# Altium PCB ECG_NEMO_final.PcbDoc
Units mm, origin at the board's own origin, x right, y up, seen from the top; angles counter-clockwise.
Board outline 225.82 x 153.5 mm, 4 copper layers (Top Layer, Signal Layer 1, Signal Layer 2, Bottom Layer), stack 0.778 mm thick; 195 components, 103 nets, 618 pads, 3 vias.
Unrouted connection lines stored in the file: 392.
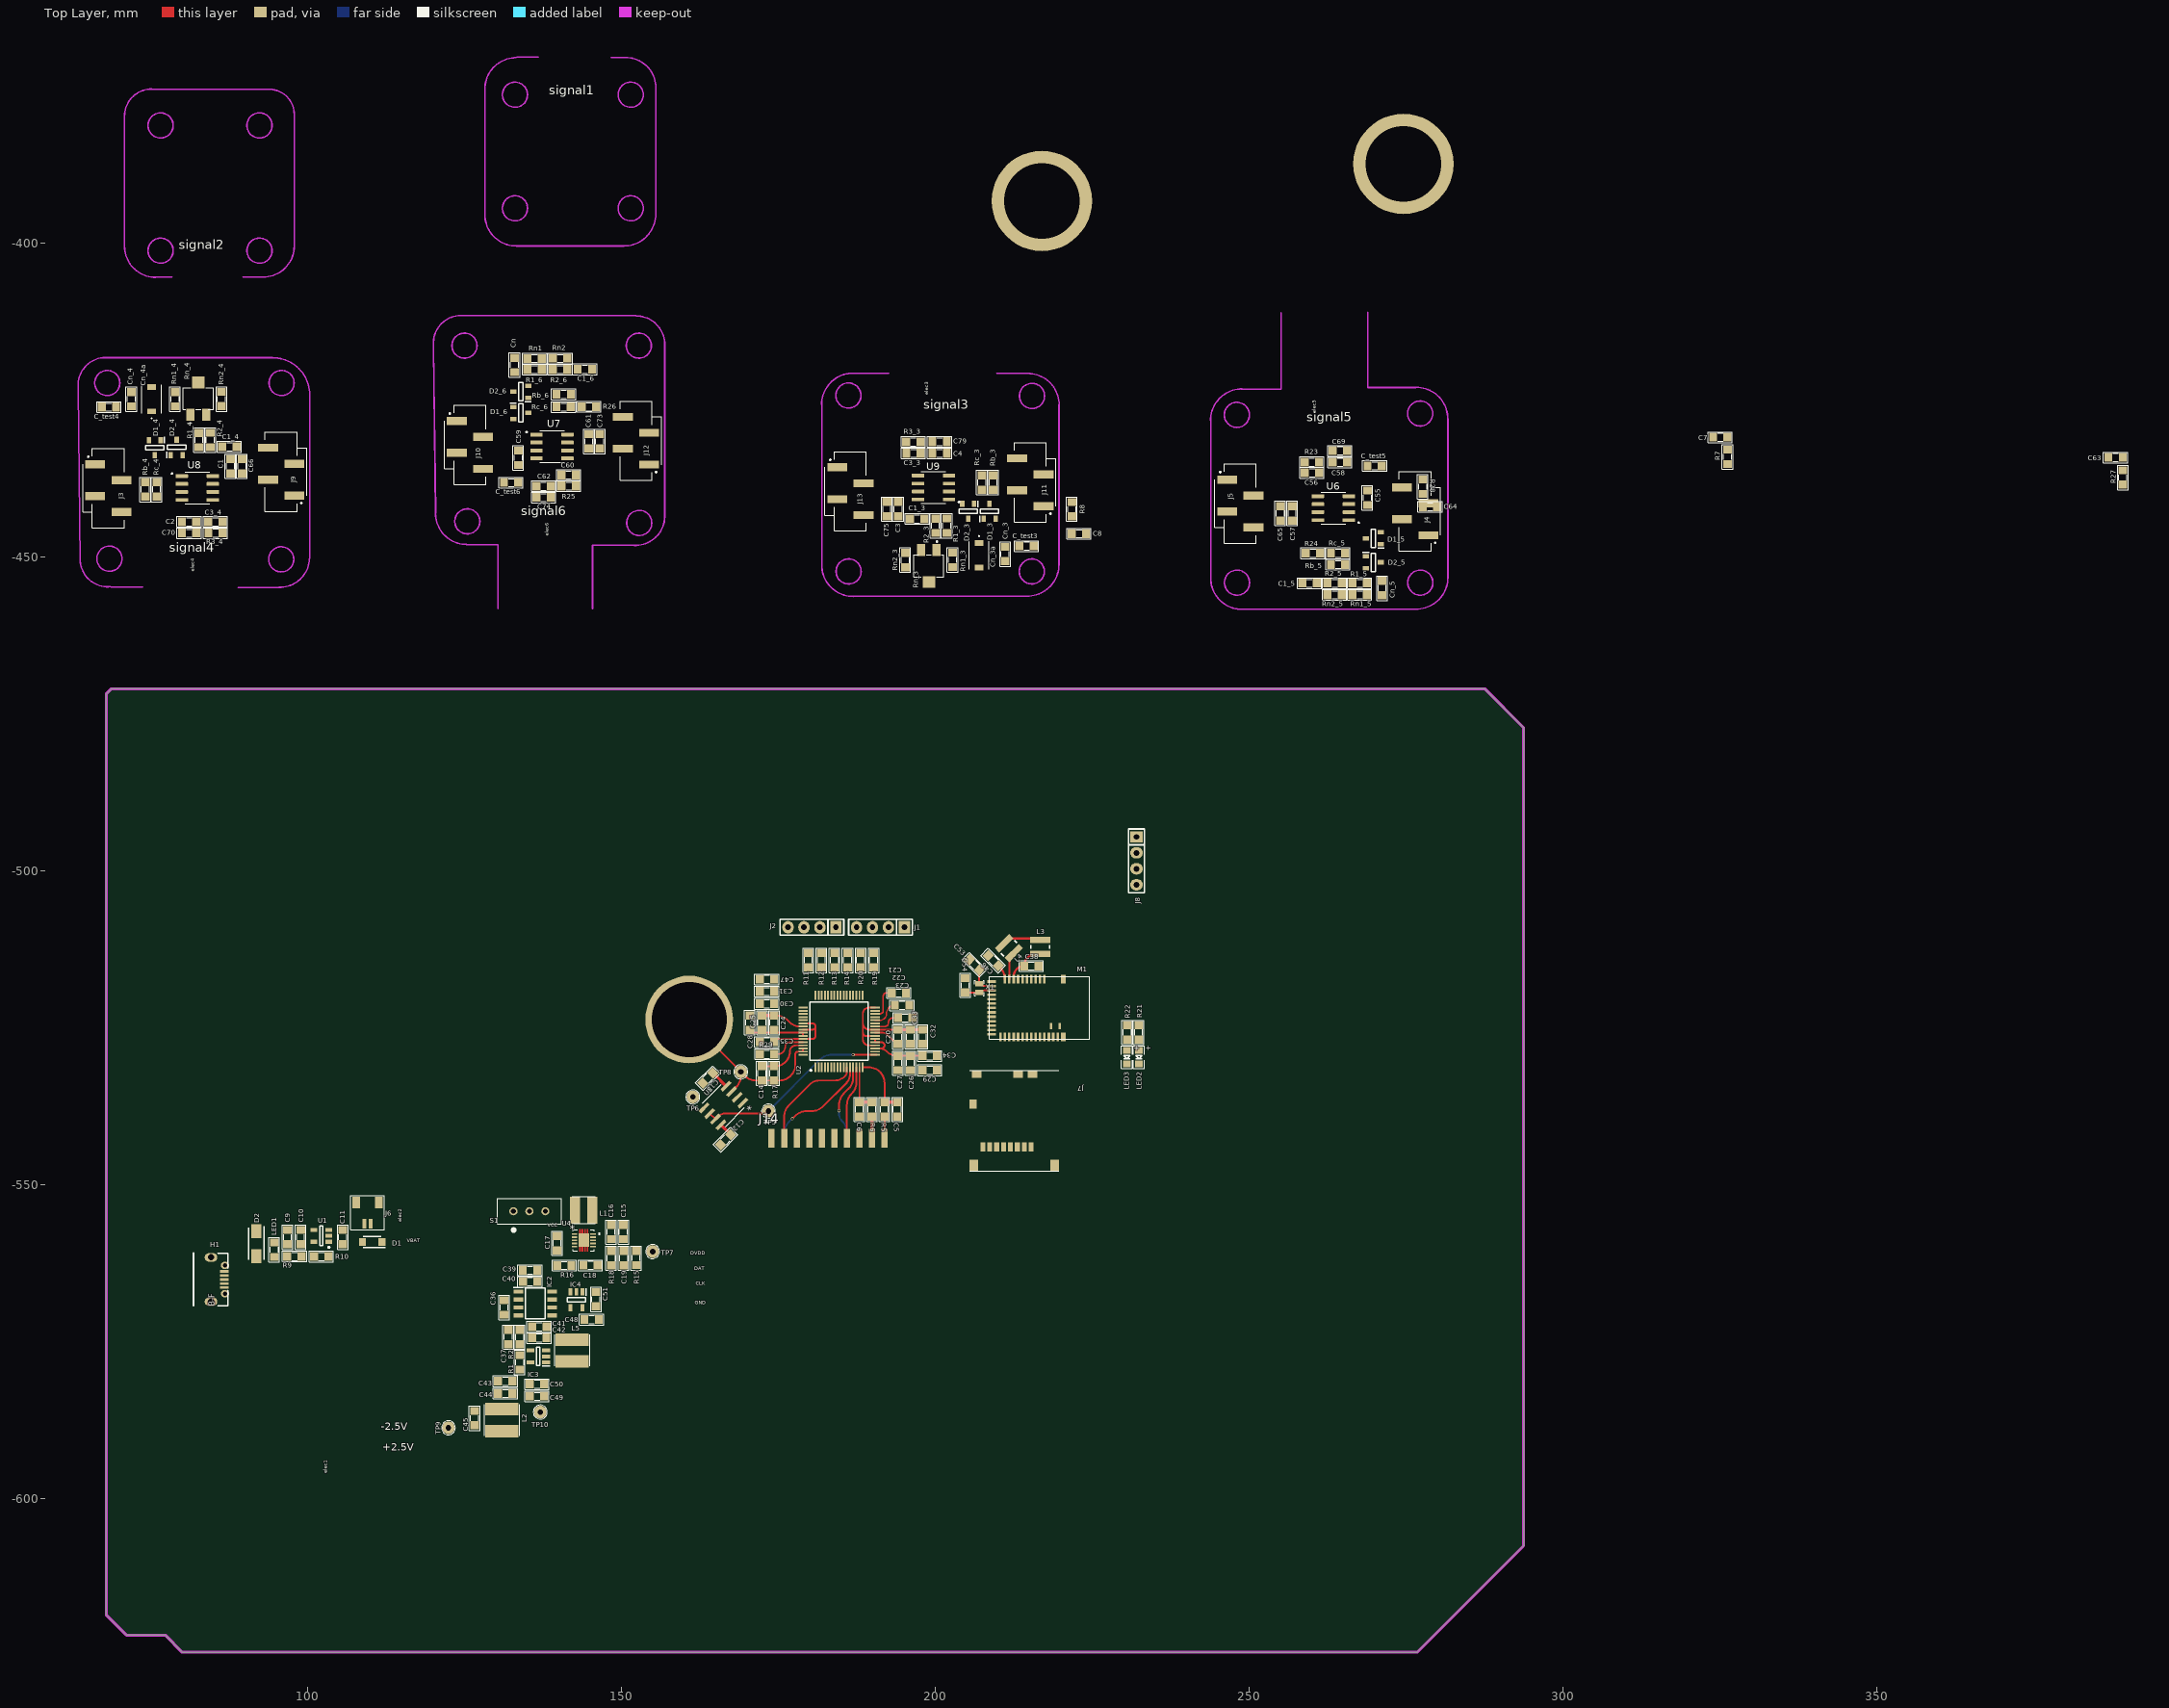
[diagram p0: Top Layer view]
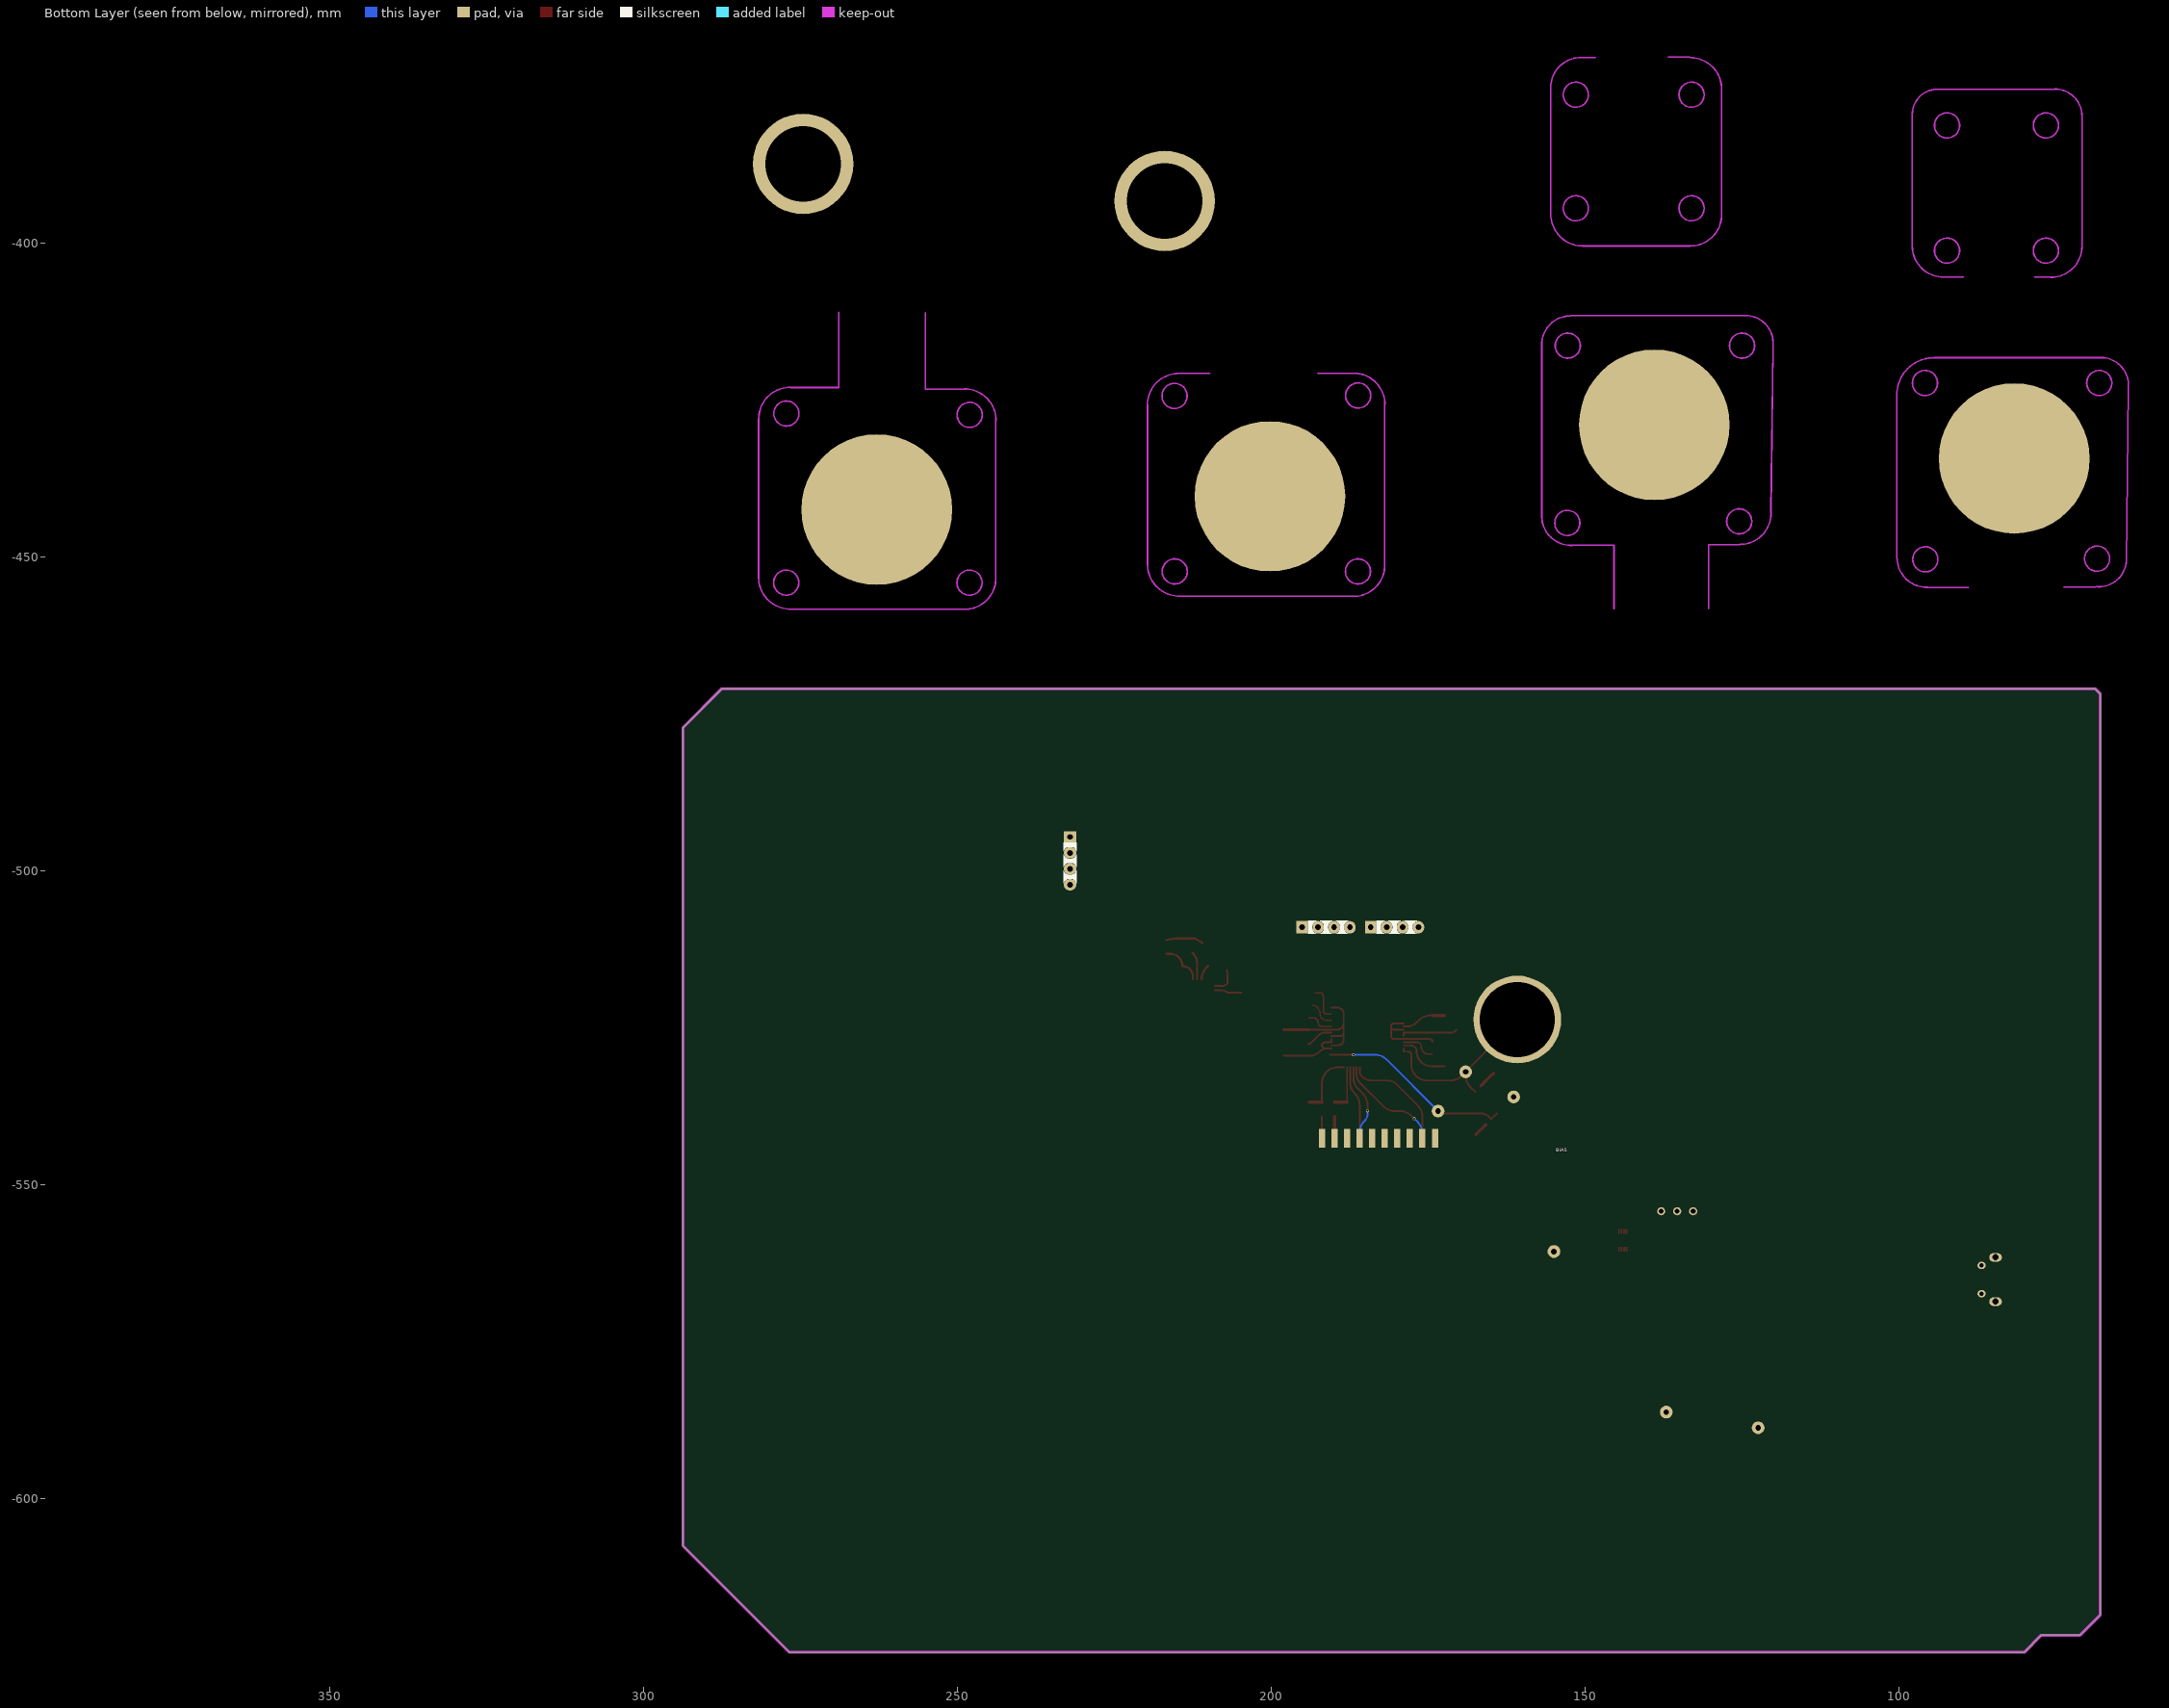
[diagram p1: Bottom Layer view, seen from below]

## Layer stack, top to bottom
Top Solder: solder mask 0.0102, Solder Resist, Dk 3.5
Top Layer: signal copper 0.0356
Dielectric 1: core 0.254, FR-4, Dk 4.2
Signal Layer 1: signal copper 0.036
Dielectric 3: prepreg 0.127, Dk 4.2
Signal Layer 2: signal copper 0.036
Dielectric 2: core 0.254, Dk 4.2
Bottom Layer: signal copper 0.0356
Solder Side: solder mask 0.0102, Solder Resist, Dk 3.5

## Board outline
67.875,-618.625 71.1,-621.85 77.275,-621.85 79.975,-624.55 276.75,-624.55 293.7,-607.6 293.7,-477.225 287.525,-471.05 68.675,-471.05 67.875,-471.85

## Design rules (kind name [scope] priority, off if disabled: settings)
Clearance Clearance_5mils [TouchesRoom('Driver') and OnTopLayer] p1 off: gap=0.127 ignorepadtopadclearanceinfootprint=FALSE except(0: Arc-Hole Track-Hole SMDPad-Hole THPad-Hole Via-Hole Fill-Hole Poly-Hole Region-Hole Text-Hole)
Clearance Clearance_5.7mils [TouchesRoom('FETs')] p2 off: gap=0.145 ignorepadtopadclearanceinfootprint=FALSE except(0: Arc-Hole Track-Hole SMDPad-Hole THPad-Hole Via-Hole Fill-Hole Poly-Hole Region-Hole Text-Hole)
Clearance Clearance_keepout [OnLayer('Keep-Out Layer')] p3 off: gap=0.711 ignorepadtopadclearanceinfootprint=FALSE except(0: Arc-Hole Track-Hole SMDPad-Hole THPad-Hole Via-Hole Fill-Hole Poly-Hole Region-Hole Text-Hole)
Clearance [All] p4: gap=0.2 ignorepadtopadclearanceinfootprint=FALSE except(0.16: SMDPad-THPad)
ComponentClearance [All] p1: gap=0.3 collisioncheckmode=3 verticalgap=0.3 showdistances=TRUE
HoleSize [All] p1: absolutevalues=TRUE maxlimit=10 minlimit=0.025 maxpercent=80.000 minpercent=20.000
HoleToHoleClearance [All] p1: gap=0.241 allowstackedmicrovias=TRUE
MinimumSolderMaskSliver [All] p1 off: minsoldermaskwidth=0.254
PlaneConnect [All] p1: planeconnectstyle=Direct reliefexpansion=0.508 reliefentries=4 reliefconductorwidth=0.254 reliefairgap=0.254
PolygonConnect [All] p1: connectstyle=Direct reliefconductorwidth=0.254 reliefentries=4 polygonreliefangle="90 Angle" airgapwidth=0.254
RoutingVias [All] p1: holewidth=0.3 width=0.5 viastyle="Through Hole" minholewidth=0.178 minwidth=0.351 maxholewidth=0.508 maxwidth=0.762
SilkToSilkClearance [All] p1 off: silktosilkclearance=0.254
SilkToSolderMaskClearance [IsPad] p1 off: minsilkscreentomaskgap=0.254 clearancetoexposedcopper=TRUE
SolderMaskExpansion [All] p1: expansion=0.102 istentingtop=FALSE
UnpouredPolygon [All] p1 off:
Width [All] p1: maxlimit=3 minlimit=0.2 preferedwidth=0.3
22 further rules are at their usual default settings.

## Components (designator, comment, footprint, x,y, rotation, side; value= is the part's Value field where it differs from the comment)
C1 "103" SM-0805 87.659,-435.586 r270 top
C1_3 "100u" SM-0805 197.076,-443.977 r180 top value=103
C1_4 "100u" SM-0805 87.491,-432.462 r0 top value=103
C1_5 "100u" SM-0805 259.592,-454.208 r180 top value=103
C1_6 "100u" SM-0805 144.131,-420.113 r0 top value=103
C2 "103" SM-0805 81.064,-444.432 r180 top
C3 "103" SM-0805 194.053,-442.402 r90 top
C3_3 "220n" SM-0805 196.492,-433.512 r0 top value=103
C3_4 "220n" SM-0805 85.255,-444.432 r180 top value=103
C4 "103" SM-0805 200.657,-433.512 r0 top
C5 "4.7nF" SM-0805 193.906,-538.048 r90 top value=103
C6 "4.7nF" SM-0805 187.885,-538.048 r90 top value=103
C7 "4.7nF" SM-0805 325.055,-430.95 r0 top value=103
C8 "4.7nF" SM-0805 222.854,-446.316 r180 top value=103
C9 "47uF" SM-0805 96.76,-558.401 r90 top value=103
C10 "4uF/10V" SM-0805 98.842,-558.401 r90 top value=103
C11 "4uF/10V" SM-0805 105.548,-558.401 r90 top value=103
C12 "0.1uF" SM-0805 166.535,-542.902 r225 top value=103
C13 "0.1uF" SM-0805 163.71,-533.077 r45 top value=103
C14 "1nF" SM-0805 172.354,-532.311 r270 top value=103
C15 "22uF" SM-0805 150.276,-557.596 r90 top value=103
C16 "22uF" SM-0805 148.32,-557.596 r90 top value=103
C17 "10uF" SM-0805 139.71,-559.374 r90 top value=103
C18 "0.1uF" SM-0805 145.025,-562.872 r0 top value=103
C19 "10pF" SM-0805 150.334,-561.761 r270 top value=103
C20 "10uF" SM-0805 194.031,-526.495 r90 top value=103
C21 "1uF" SM-0805 194.158,-519.505 r180 top value=103
C22 "100uF" SM-0805 194.666,-521.461 r0 top value=103
C23 "1uF" SM-0805 195.174,-523.468 r180 top value=103
C24 "1uF" SM-0805 174.284,-524.238 r90 top value=103
C25 "0.1uF" SM-0805 172.354,-524.238 r90 top value=103
C26 "1uF" SM-0805 196.017,-530.676 r90 top value=103
C27 "0.1uF" SM-0805 194.031,-530.676 r90 top value=103
C28 "1uF" SM-0805 170.436,-524.238 r270 top value=103
C29 "0.1uF" SM-0805 199.084,-531.819 r180 top value=103
C30 "1uF" SM-0805 173.141,-521.21 r0 top value=103
C31 "0.1uF" SM-0805 173.141,-519.266 r0 top value=103
C32 "1uF" SM-0805 197.941,-526.495 r270 top value=103
C33 "0.1uF" SM-0805 196.017,-526.495 r270 top value=103
C34 "1uF" SM-0805 199.084,-529.533 r180 top value=103
C35 "0.1uF" SM-0805 173.141,-527.279 r0 top value=103
C36 "1uF" SM-0805 131.277,-569.627 r270 top value=103
C37 "0.01uF" SM-0805 131.912,-574.326 r90 top value=103
C38 "1uF" SM-0805 215.265,-515.209 r180 top value=103
C39 "10uF" SM-0805 135.387,-563.681 r0 top value=103
C40 "1uF" SM-0805 135.392,-565.5 r0 top value=103
C41 "10uF" SM-0805 136.865,-572.675 r0 top value=103
C42 "2.2uF" SM-0805 136.861,-574.473 r0 top value=103
C43 "2.2uF" SM-0805 131.444,-581.363 r180 top value=103
C44 "1uF" SM-0805 131.444,-583.319 r180 top value=103
C45 "10uF" SM-0805 126.577,-587.253 r270 top value=103
C46 "10uF" SM-0805 209.194,-514.35 r315 top value=103
C47 "1uF" SM-0805 173.141,-517.322 r0 top value=103
C48 "1uF" SM-0805 145.196,-571.557 r180 top value=103
C49 "10uF" SM-0805 136.507,-583.756 r0 top value=103
C50 "0.1uF" SM-0805 136.507,-581.826 r0 top value=103
C51 "1uF" SM-0805 145.901,-568.296 r90 top value=103
C53 "12pF" SM-0805 206.197,-515.01 r315 top value=103
C54 "12pF" SM-0805 204.749,-518.287 r270 top value=103
C55 "103" SM-0805 268.839,-440.595 r270 top
C56 "220n" SM-0805 259.999,-436.606 r0 top value=103
C57 "103" SM-0805 256.839,-443.095 r270 top
C58 "103" SM-0805 264.45,-434.93 r0 top
C59 "103" SM-0805 133.544,-434.235 r270 top
C60 "220n" SM-0805 141.545,-436.953 r180 top value=103
C61 "103" SM-0805 144.776,-431.61 r90 top
C62 "103" SM-0805 137.557,-438.757 r180 top
C63 "4.7nF" SM-0805 388.05,-434.175 r0 top value=103
C64 "4.7nF" SM-0805 278.801,-442.031 r180 top value=103
C65 "103" SM-0805 254.95,-443.095 r270 top
C66 "103" SM-0805 89.504,-435.586 r270 top
C69 "103" SM-0805 264.45,-433.1 r0 top
C70 "103" SM-0805 81.064,-446.229 r180 top
C73 "103" SM-0805 146.501,-431.61 r90 top
C74 "103" SM-0805 137.557,-440.556 r180 top
C75 "103" SM-0805 192.255,-442.402 r90 top
C79 "103" SM-0805 200.657,-431.676 r0 top
C_test3 "1p" SM-0805 214.513,-448.27 r0 top value=103
C_test4 "1p" SM-0805 68.288,-426.138 r180 top value=103
C_test5 "1p" SM-0805 269.981,-435.514 r180 top value=103
C_test6 "1p" SM-0805 132.375,-438.172 r0 top value=103
Cn "4p" SM-0805 132.934,-419.453 r270 top value=103
Cn_3 "4p" SM-0805 211.097,-449.565 r90 top value=103
Cn_3a "4p" JZ100 206.956,-449.763 r270 top
Cn_4 "4p" SM-0805 71.88,-424.893 r270 top value=103
Cn_4a "4p" JZ100 75.095,-424.893 r90 top
Cn_5 "4p" SM-0805 271.175,-454.996 r90 top value=103
D1 "SS34FA" SODFL3618X143N 110.231,-559.196 r180 top
D1_3 "BAS21" SOT95P240X120-3N 208.623,-442.774 r90 top
D1_4 "BAS21" SOT95P240X120-3N 75.602,-432.609 r270 top
D1_5 "BAS21" SOT95P240X120-3N 269.778,-447.054 r180 top
D1_6 "BAS21" SOT95P240X120-3N 133.905,-427.087 r0 top
D2 "N4007" DIOM5025X220N 91.773,-559.459 r270 top
D2_3 "BAS21" SOT95P240X120-3N 205.214,-442.774 r270 top
D2_4 "BAS21" SOT95P240X120-3N 79.082,-432.583 r90 top
D2_5 "BAS21" SOT95P240X120-3N 269.778,-450.887 r0 top
D2_6 "BAS21" SOT95P240X120-3N 133.905,-423.719 r180 top
H1 "USB B Micro/Mini" "USB-B-MICRO-female Tai02" 84.075,-564.867 r90 top
IC2 "LM2660MX_NOPB" SOIC127P600X175-8N 136.23,-568.992 r0 top
IC3 "TPS72301DDCT" SOT95P280X110-5N 136.713,-577.424 r180 top
IC4 "LDK130M25R" SOT95P280X145-5N 142.783,-568.382 r270 top
J1 "Test1" sip4 191.237,-509.041 r180 top value="Connector 4x2"
J2 "Test2" sip4 180.315,-509.041 r180 top value="Connector 4x2"
J3 "171973-0004" 1719730004 -1201.805,830.934 r90 top
J4 "171973-0004" 1719730004 1546.433,-1712.765 r270 top
J5 "171973-0004" 1719730004 -1021.428,828.48 r90 top
J6 "Jumper 2" "J2_Jst SH_1mm" 110.001,-556.296 r180 top value="JP 2"
J7 "502570-0893" MOLEX_502570-0893 212.547,-539.852 r180 top
J8 "Loading" SIP4 232.039,-498.456 r270 top value="Connector 4x2"
J9 "171973-0004" 1719730004 1365.742,-1706.45 r270 top
J10 "171973-0004" 1719730004 -1144.186,837.822 r90 top
J11 "171973-0004" 1719730004 1485.114,-1708.135 r270 top
J12 "171973-0004" 1719730004 1422.281,-1701.518 r270 top
J13 "171973-0004" 1719730004 -1083.563,830.442 r90 top
J14 "DF11-20DP-2DSA_01_" "20P 2.5mm" 191.885,-542.671 r180 top
L1 "1.5uH, 1.75A" WE-TPC_381692 1413.942,715.907 r0 top
L2 "3.3 uH, 1.95A" WE-TPC_4818/482892 1400.896,-1857.582 r270 top
L3 "10 uH, 1 A" WE-TPC_2828 216.665,-512.166 r0 top
L4 "15 uH, 0.72 A" WE-TPC_2828 211.709,-512.369 r225 top
L5 "3.3 uH, 1.95A" WE-TPC_4818/482892 1412.123,-1846.482 r270 top
LED1 "LED" SM-0805 94.641,-560.407 r270 top value="LED 3 ly Single Colour"
LED2 "LED" led0805 232.415,-529.74 r270 top value="LED 3 ly Single Colour"
LED3 "LED" led0805 230.51,-529.74 r270 top value="LED 3 ly Single Colour"
M1 "MODULE_MDBT42Q" PCB_MDBT42Q_10X16 224.565,-521.896 r270 top
R1 "100k" SM-0805 133.766,-578.364 r270 top value="R1/4W - 1K"
R1_3 "1M" SM-0805 201.8,-445.044 r90 top value="R1/4W - 1K"
R1_4 "1M" SM-0805 82.639,-431.421 r270 top value="R1/4W - 1K"
R1_5 "1M" SM-0805 267.593,-454.208 r0 top value="R1/4W - 1K"
R1_6 "1M" SM-0805 136.114,-420.164 r180 top value="R1/4W - 1K"
R2 "100k" SM-0805 133.766,-574.346 r270 top value="R1/4W - 1K"
R2_3 "100k" SM-0805 200.022,-445.069 r270 top value="R1/4W - 1K"
R2_4 "100k" SM-0805 84.468,-431.396 r90 top value="R1/4W - 1K"
R2_5 "100k" SM-0805 263.606,-454.208 r0 top value="R1/4W - 1K"
R2_6 "100k" SM-0805 140.178,-420.164 r180 top value="R1/4W - 1K"
R3_3 "10M" SM-0805 196.466,-431.701 r180 top value="R1/4W - 1K"
R3_4 "10M" SM-0805 85.281,-446.204 r0 top value="R1/4W - 1K"
R5 "4.99k" SM-0805 191.885,-538.048 r90 top value="R1/4W - 1K"
R6 "4.99k" SM-0805 189.885,-538.048 r90 top value="R1/4W - 1K"
R7 "4.99k" SM-0805 326.205,-434.091 r90 top value="R1/4W - 1K"
R8 "4.99k" SM-0805 221.736,-442.423 r270 top value="R1/4W - 1K"
R9 "2k" SM-0805 97.847,-561.469 r180 top value="R1/4W - 1K"
R10 "470" SM-0805 102.139,-561.479 r0 top value="R1/4W - 1K"
R11 "10k" SM-0805 179.75,-514.282 r90 top value="R1/4W - 1K"
R12 "10k" SM-0805 181.832,-514.282 r90 top value="R1/4W - 1K"
R13 "10k" SM-0805 183.915,-514.282 r90 top value="R1/4W - 1K"
R14 "10k" SM-0805 185.998,-514.282 r90 top value="R1/4W - 1K"
R15 "666k" SM-0805 152.308,-561.736 r90 top value="R1/4W - 1K"
R16 "1M" SM-0805 140.848,-562.92 r180 top value="R1/4W - 1K"
R17 "499k, 01%" SM-0805 174.284,-532.311 r270 top value="R1/4W - 1K"
R18 "111k" SM-0805 148.334,-561.761 r270 top value="R1/4W - 1K"
R19 "10k" SM-0805 190.164,-514.282 r90 top value="R1/4W - 1K"
R20 "10k" SM-0805 188.081,-514.282 r90 top value="R1/4W - 1K"
R21 "1k" SM-0805 232.39,-525.79 r270 top value="R1/4W - 1K"
R22 "1k" SM-0805 230.561,-525.79 r270 top value="R1/4W - 1K"
R23 "10M" SM-0805 259.973,-434.93 r180 top value="R1/4W - 1K"
R24 "100" SM-0805 260.151,-449.408 r0 top value="R1/4W - 1K"
R25 "10M" SM-0805 141.57,-438.731 r0 top value="R1/4W - 1K"
R26 "100" SM-0805 144.77,-426.107 r180 top value="R1/4W - 1K"
R27 "4.99k" SM-0805 389.215,-437.371 r90 top value="R1/4W - 1K"
R28 "4.99k" SM-0805 277.659,-438.836 r270 top value="R1/4W - 1K"
R29 "1k" SM-0805 173.141,-529.26 r180 top value="R1/4W - 1K"
Rb_3 "10M" SM-0805 209.217,-438.186 r270 top value="R1/4W - 1K"
Rb_4 "10M" SM-0805 74.079,-439.27 r90 top value="R1/4W - 1K"
Rb_5 "10M" SM-0805 264.155,-451.236 r0 top value="R1/4W - 1K"
Rb_6 "10M" SM-0805 140.757,-424.126 r180 top value="R1/4W - 1K"
Rc_3 "100k" SM-0805 207.414,-438.186 r270 top value="R1/4W - 1K"
Rc_4 "100k" SM-0805 75.908,-439.27 r90 top value="R1/4W - 1K"
Rc_5 "100k" SM-0805 264.155,-449.408 r0 top value="R1/4W - 1K"
Rc_6 "100k" SM-0805 140.732,-426.133 r180 top value="R1/4W - 1K"
Rn1 "420k" SM-0805 136.114,-418.411 r180 top value="R1/4W - 1K"
Rn1_3 "420k" SM-0805 202.715,-450.505 r90 top value="R1/4W - 1K"
Rn1_4 "420k" SM-0805 78.855,-424.893 r270 top value="R1/4W - 1K"
Rn1_5 "420k" SM-0805 267.593,-456.056 r0 top value="R1/4W - 1K"
Rn2 "80k" SM-0805 140.178,-418.386 r180 top value="R1/4W - 1K"
Rn2_3 "80k" SM-0805 195.196,-450.53 r270 top value="R1/4W - 1K"
Rn2_4 "80k" SM-0805 86.221,-424.868 r90 top value="R1/4W - 1K"
Rn2_5 "80k" SM-0805 263.606,-456.056 r0 top value="R1/4W - 1K"
Rn_3 "3224X-1-105E" 3224X1502E 198.935,-451.48 r270 top
Rn_4 "3224X-1-105E" 3224X1502E 82.538,-424.811 r90 top
S1 "SS12SDP2" SS12SDP2 135.29,-554.285 r90 top
TP5 "TP" TP1 173.383,-538.328 r180 top value="Test Point"
TP6 "TP" TP1 161.335,-536.077 r180 top value="Test Point"
TP7 "TP" TP1 154.921,-560.704 r180 top value="Test Point"
TP8 "TP" TP1 168.989,-532.079 r180 top value="Test Point"
TP9 "TP" TP1 122.387,-588.788 r90 top value="Test Point"
TP10 "TP" TP1 137.018,-586.289 r0 top value="Test Point"
U1 "MCP73832T-2ACI/OT" SOT-23-OT5_N 102.14,-558.206 r180 top
U2 "Part Number: ADS1299IPAGR" QFP50P1200X1200X120-64N 184.635,-525.602 r90 top value=Value
U3 "OPA2376AIDR" D8 166.21,-537.427 r225 top value=Value
U4 "Part Number: TPS63060DSCR" DSC10_1P70X2P15 143.958,-558.916 r0 top value=Value
U6 "LMC6442" SOIC127P599X175-8N 263.409,-442.26 r180 top
U7 "LMC6442" SOIC127P599X175-8N 138.88,-432.432 r0 top
U8 "LMC6442" SOIC127P599X175-8N 82.372,-439.041 r0 top
U9 "LMC6442" SOIC127P599X175-8N 199.692,-438.973 r180 top
X1 "32.768kHz" "Crystal 32.768kHz SMD" 206.985,-519.53 r90 top value=4Mhz

## Footprints (in the part's own frame and the unit in brackets; to place one, negate y for a bottom-side part, rotate by r counter-clockwise, add the part's x,y. Pads: shape width x height; smd on the part's side, far side on the other; paste and mask are expansions set on the pad)
"20P 2.5mm" [mm]
  rect 1x3 smd: 1(0,0) 3(2,0) 5(4,0) 7(6,0) 9(8,0) 11(10,0) 13(12,0) 15(14,0) 17(16,0) 19(18,0)
  rect 1x3 smd far side: 2(0,0) 4(2,0) 6(4,0) 8(6,0) 10(8,0) 12(10,0) 14(12,0) 16(14,0) 18(16,0) 20(18,0)
  body extent -2.31,-1.45 20.39,7.35, height 3.51
3224X1502E [mm]
  rect 1.9x1.3 smd: 1(-2.55,1.25) 3(-2.55,-1.25)
  rect 1.9x2 smd: 2(2.55,0)
  silkscreen extent -4,-2.4 1.75,2.4, body extent -3.37,-2.4 3.31,2.4, height 5.1
1719730004 [mm]
  rect 1.27x3.18 smd: 1(-1266.19,-1267.9) 2(-1268.73,-1272.1) 3(-1271.27,-1267.9) 4(-1273.81,-1272.1)
  silkscreen extent -1276.31,-1272.55 -1263.69,-1265.95
"Crystal 32.768kHz SMD" [mm]
  rect 0.8x1.3 smd: 1(0.1,0) 2(1.5,0)
  silkscreen extent -0.45,-0.8 2.05,0.8
D8 [mil]
  rect 78x22 smd paste+0 mask+0: 1(-97,75) 2(-97,25) 3(-97,-25) 4(-97,-75) 5(97,-75) 6(97,-25) 7(97,25) 8(97,75)
  silkscreen extent -84,-103 84,103, body extent 0,0 10,10, height 10
DIOM5025X220N [mm]
  rect 2.25x1.6 smd: 1(-2,0) 2(2,0)
  silkscreen extent -2.8,-1.25 2.5,1.25, body extent -2.5,-1.25 2.5,1.25, height 2.2
DSC10_1P70X2P15 [mm]
  rect 0.85x0.28 smd: 1(-1.475,1) 2(-1.475,0.5) 3(-1.475,0) 4(-1.475,-0.5) 5(-1.475,-1) 6(1.475,-1) 7(1.475,-0.5) 8(1.475,0) 9(1.475,0.5) 10(1.475,1)
  rect 1.7x2.15 smd paste-1.062 mask-1.067: 11(0,0)
  Top Layer region: -0.1,1.775 -0.1,1.075 -0.3,1.075 -0.3,1.775
  Top Layer region: 0.1,1.775 0.1,1.075 0.3,1.075 0.3,1.775
  Top Layer region: -0.5,1.775 -0.5,1.075 -0.7,1.075 -0.7,1.775
  Top Layer region: 0.5,1.775 0.5,1.075 0.7,1.075 0.7,1.775
  Top Layer region: -0.1,-1.775 -0.1,-1.075 -0.3,-1.075 -0.3,-1.775
  Top Layer region: 0.1,-1.775 0.1,-1.075 0.3,-1.075 0.3,-1.775
  Top Layer region: -0.5,-1.775 -0.5,-1.075 -0.7,-1.075 -0.7,-1.775
  Top Layer region: 0.5,-1.775 0.5,-1.075 0.7,-1.075 0.7,-1.775
  silkscreen extent -1.7,-1.7 2.59,1.7, body extent 0,0 0.25,0.25, height 0.25
"J2_Jst SH_1mm" [mm] "Jum select vdd or gnd"
  rect 1.2x1.8 smd: 0(-1.3,-3.4) 0(2.3,-3.4)
  rect 0.65x1.55 smd: 1(0,0) 2(1,0)
  silkscreen extent -2.2,-4.47 3.2,0.97
JZ100 [mm]
  rect 0.9x1.4 smd: 1(-1.95,0) 2(1.95,0)
  silkscreen extent -3.1,-1.6 2.25,1.6, body extent -2.31,-1.6 2.31,1.6, height 1.55
led0805 [mil]
  rect 43x50 smd: A(-43,0) K(43,0)
  silkscreen extent -71,-34 71,34, body extent -40,-26 40,24, height 43
MOLEX_502570-0893 [mm]
  rect 0.8x1.5 smd: 1(-2.7,4.2) 2(-1.6,4.2) 3(-0.5,4.2) 4(0.6,4.2) 5(1.7,4.2) 6(2.8,4.2) 7(3.9,4.2) 8(5,4.2)
  rect 1.15x1.5 smd: DL(6.575,-2.65)
  rect 1.5x1.15 smd: DS(-0.6,-7.375) SM3(-2.9,-7.375) SM4(6,-7.375)
  rect 1.4x1.7 smd: SM1(-6.45,7.1) SM2(6.45,7.1)
  silkscreen extent -7.1,-8 7.1,8
PCB_MDBT42Q_10X16 [mm]
  rect 1.4x0.8 smd mask+0: 1(-4.6,-4.2) 39(4.6,-4.2)
  rect 1.4x0.4 smd mask+0: 2(-4.6,-7.2) 3(-4.6,-7.9) 5(-4.6,-9.3) 6(-4.6,-10) 7(-4.6,-10.7) 8(-4.6,-11.4) 9(-4.6,-12.1) 10(-4.6,-12.8) 11(-4.6,-13.5) 25(4.6,-14.2) 26(4.6,-13.5) 27(4.6,-12.8) 28(4.6,-12.1) 29(4.6,-11.4) 30(4.6,-10.7) 31(4.6,-10) 32(4.6,-9.3) 33(4.6,-8.6) 34(4.6,-7.9) 35(4.6,-7.2) 36(4.6,-6.5) 37(4.6,-5.8) 38(4.6,-5.1)
  rect 1.4x0.4 smd: 4(-4.6,-8.6)
  rect 0.4x1.4 smd mask+0: 12(-4.2,-15.6) 13(-3.5,-15.6) 14(-2.8,-15.6) 15(-2.1,-15.6) 16(-1.4,-15.6) 17(-0.7,-15.6) 18(0,-15.6) 19(0.7,-15.6) 20(1.4,-15.6) 21(2.1,-15.6) 22(2.8,-15.6) 23(3.5,-15.6) 24(4.2,-15.6)
  rect 1x0.4 smd mask+0: 40(2.9,-4.75) 41(2.9,-6.15)
  silkscreen extent -5,-16 5,0
QFP50P1200X1200X120-64N [mm]
  rect 1.475x0.3 smd: 1(-5.738,3.75) 2(-5.738,3.25) 3(-5.738,2.75) 4(-5.738,2.25) 5(-5.738,1.75) 6(-5.738,1.25) 7(-5.738,0.75) 8(-5.738,0.25) 9(-5.738,-0.25) 10(-5.738,-0.75) 11(-5.738,-1.25) 12(-5.738,-1.75) 13(-5.738,-2.25) 14(-5.738,-2.75) 15(-5.738,-3.25) 16(-5.738,-3.75) 33(5.738,-3.75) 34(5.738,-3.25) 35(5.738,-2.75) 36(5.738,-2.25) 37(5.738,-1.75) 38(5.738,-1.25) 39(5.738,-0.75) 40(5.738,-0.25) 41(5.738,0.25) 42(5.738,0.75) 43(5.738,1.25) 44(5.738,1.75) 45(5.738,2.25) 46(5.738,2.75) 47(5.738,3.25) 48(5.738,3.75)
  rect 0.3x1.475 smd: 17(-3.75,-5.738) 18(-3.25,-5.738) 19(-2.75,-5.738) 20(-2.25,-5.738) 21(-1.75,-5.738) 22(-1.25,-5.738) 23(-0.75,-5.738) 24(-0.25,-5.738) 25(0.25,-5.738) 26(0.75,-5.738) 27(1.25,-5.738) 28(1.75,-5.738) 29(2.25,-5.738) 30(2.75,-5.738) 31(3.25,-5.738) 32(3.75,-5.738) 49(3.75,5.738) 50(3.25,5.738) 51(2.75,5.738) 52(2.25,5.738) 53(1.75,5.738) 54(1.25,5.738) 55(0.75,5.738) 56(0.25,5.738) 57(-0.25,5.738) 58(-0.75,5.738) 59(-1.25,5.738) 60(-1.75,5.738) 61(-2.25,5.738) 62(-2.75,5.738) 63(-3.25,5.738) 64(-3.75,5.738)
  silkscreen extent -6.35,-4.65 4.65,4.65, body extent -6,-6 6,6, height 1.2
sip4 [mm]
  rect 1.8x2 hole 0.9: 1(-3.81,0)
  oval 1.8x2 hole 0.9: 2(-1.27,0) 3(1.27,0) 4(3.81,0)
  silkscreen extent -5.08,-1.27 5.08,1.27, body extent -4.83,-1.27 5.33,1.27, height 8.54
SIP4 [mm]
  rect 1.8x2 hole 0.9: 1(-3.81,0)
  oval 1.8x2 hole 0.9: 2(-1.27,0) 3(1.27,0) 4(3.81,0)
  silkscreen extent -5.08,-1.27 5.08,1.27, body extent -4.83,-1.27 5.33,1.27, height 8.54
SM-0805 [mil]
  rect 50x55 smd: 1(-45,0) 2(45,0)
  silkscreen extent -77,-34 76,33, body extent -40,-25 40,25, height 24
SODFL3618X143N [mm]
  rect 1.12x1.22 smd: 1(-1.55,0) 2(1.55,0)
  silkscreen extent -2.11,-0.9 1.4,0.9, body extent -1.8,-0.9 1.8,0.9, height 1.43
SOIC127P599X175-8N [mm]
  rrect25% 1.97x0.6 smd: 1(-2.47,1.905) 2(-2.47,0.635) 3(-2.47,-0.635) 4(-2.47,-1.905) 5(2.47,-1.905) 6(2.47,-0.635) 7(2.47,0.635) 8(2.47,1.905)
  silkscreen extent -4.14,-2.52 1.95,2.52, body extent -3,-2.45 3,2.45, height 1.75
SOIC127P600X175-8N [mm]
  rect 1.528x0.65 smd: 1(-2.711,1.905) 2(-2.711,0.635) 3(-2.711,-0.635) 4(-2.711,-1.905) 5(2.711,-1.905) 6(2.711,-0.635) 7(2.711,0.635) 8(2.711,1.905)
  silkscreen extent -3.47,-2.45 1.6,2.58, body extent -3.01,-2.45 3.01,2.45, height 1.63
SOT95P240X120-3N [mm]
  rect 1x0.7 smd: 1(-1.2,0.95) 2(-1.2,-0.95) 3(1.2,0)
  silkscreen extent -1.7,-1.46 0.35,1.55, body extent -1.2,-1.46 1.2,1.46, height 1.2
SOT95P280X110-5N [mm]
  rect 1.25x0.6 smd: 1(-1.25,0.95) 2(-1.25,0) 3(-1.25,-0.95) 4(1.25,-0.95) 5(1.25,0.95)
  silkscreen extent -1.88,-1.45 0.28,1.5, body extent -1.4,-1.45 1.4,1.45, height 0.97
SOT95P280X145-5N [mm]
  rect 1.15x0.6 smd: 1(-1.25,0.95) 2(-1.25,0) 3(-1.25,-0.95) 4(1.25,-0.95) 5(1.25,0.95)
  silkscreen extent -1.83,-1.48 0.33,1.5, body extent -1.4,-1.48 1.4,1.48, height 1.45
SOT-23-OT5_N [mm]
  rect 1.1x0.65 smd: 1(-1.2,0.95) 2(-1.2,0) 3(-1.2,-0.95) 4(1.2,-0.95) 5(1.2,0.95)
  silkscreen extent -1.33,-1.55 0.25,1.95, body extent -0.9,-1.55 0.9,1.55, height 1.45
SS12SDP2 [mm]
  round 1.3 hole 0.8: 1(0,2.54) 2(0,0) 3(0,-2.54)
  silkscreen extent -3.25,-5.1 2,5.1, body extent -2,-5.1 2,5.1, height 4
TP1 [mil]
  round 80 hole 35: 1(0,0)
  silkscreen extent -44,-44 44,44
"USB-B-MICRO-female Tai02" [mm]
  rect 0.4x1.35 smd: 1(1,-2.6) 2(0.35,-2.6) 3(-0.3,-2.6) 4(-0.95,-2.6) 5(-1.6,-2.6)
  oval 1.4x2 hole 1: 5(-3.825,-0.475) 5(3.225,-0.475)
  oval 1.15x1.3 hole 0.7: 5(-2.55,-2.7) 5(1.95,-2.7)
  silkscreen extent -4.5,-3.15 3.95,2.3
WE-TPC_2828 [mm]
  rect 3.2x1 smd: 1(0,1.1) 2(0,-1.1)
  silkscreen extent -1.49,-0.3 1.49,0.3, body extent -1.4,-1.4 1.4,1.4, height 2.82
WE-TPC_4818/482892 [mm]
  rect 2x5.3 smd: 1(-1271.75,-1270) 2(-1268.25,-1270)
  silkscreen extent -1272.49,-1272.8 -1267.51,-1267.2
WE-TPC_381692 [mm]
  rect 1.6x4.3 smd: 1(-1271.356,-1270.014) 2(-1268.644,-1270.014)
  silkscreen extent -1271.87,-1272.18 -1268.13,-1267.82

## Part data
C1 C1_3 C1_4 C1_5 C1_6 C2 C3 C3_3 C3_4 C4 C5 C6 C7 C8 C9 C10 C11 C12 C13 C14 C15 C16 C17 C18 C19 C20 C21 C22 C23 C24 C25 C26 C27 C28 C29 C30 C31 C32 C33 C34 C35 C36 C37 C38 C39 C40 C41 C42 C43 C44 C45 C46 C47 C48 C49 C50 C51 C53 C54 C56 C57 C58 C59 C60 C61 C62 C63 C64 C65 C66 C69 C70 C73 C74 C75 C79 Cn Cn_3 Cn_4 Cn_5: library part CM, "Cap SMD"
C55 C_test3 C_test4 C_test5 C_test6: library part CM_5, "Cap SMD"
Cn_3a Cn_4a: library part JZ100, "Capacitor", Manufacturer_Name=Knowles, Mouser Part Number=768-JZ100, Datasheet Link=https://www.knowlescapacitors.com/getattachment/4e3ef37f-1910-4b01-89e4-302e57c70f90/JZ-Series.aspx, Height=1.45mm, Manufacturer_Part_Number=JZ100
D1: "Schottky Diode", Manufacturer_Name="ON Semiconductor", Mouser Part Number=512-SS34FA, Datasheet Link=https://componentsearchengine.com/Datasheets/1/SS34FA.pdf, Height=1.43mm, Manufacturer_Part_Number=SS34FA, Mouser Price/Stock=https://www.mouser.com/Search/Refine.aspx?Keyword=512-SS34FA
D1_3 D1_4 D1_5 D1_6 D2_3 D2_4 D2_5 D2_6: "Diode", Manufacturer_Name=onsemi, Mouser Part Number=512-BAS21, Arrow Part Number=BAS21, Arrow Price/Stock=https://www.arrow.com/en/products/bas21/on-semiconductor, Datasheet Link=http://www.onsemi.com/pub/Collateral/BAS21-D.pdf, Height=1.2mm, Manufacturer_Part_Number=BAS21, Mouser Price/Stock=https://www.mouser.co.uk/ProductDetail/ON-Semiconductor-Fairchild/BAS21?qs=GXJjH%252BIVz3MgJ%252Bf2%252BjymzQ%3D%3D
D2: library part EC11FS2, "Diode", Manufacturer_Name=KYOCERA, Mouser Part Number=346-EC11FS2, Datasheet Link=https://www.mouser.jp/datasheet/2/909/EC11FS2-file-1588983.pdf, Height=2.2mm, Manufacturer_Part_Number=EC11FS2
H1: library part "USB B Female Micro/Mini SMD", "USB B Female Micro/Mini SMD"
IC2: "Integrated Circuit", Arrow Part Number="LM2660MX NOPB", Manufacturer_Name="Texas Instruments", Arrow Price/Stock=https://www.arrow.com/en/products/lm2660mxnopb/texas-instruments, Datasheet Link=https://www.ti.com/lit/ds/symlink/lm2660.pdf?ts=1636191506646&ref_url=https%253A%252F%252Fwww.ti.com%252Fstore%252Fti%252Fen%252Fp%252Fproduct%252F%253Fp%253DLM2660MX%252FNOPB, Height=1.75mm, Manufacturer_Part_Number="LM2660MX NOPB"
IC3: "Integrated Circuit", Manufacturer_Name="Texas Instruments", Mouser Part Number=595-TPS72301DDCT, Arrow Part Number=TPS72301DDCT, Arrow Price/Stock=https://www.arrow.com/en/products/tps72301ddct/texas-instruments?region=nac, Datasheet Link=http://www.ti.com/lit/gpn/TPS723, Height=1.1mm, Manufacturer_Part_Number=TPS72301DDCT, Mouser Price/Stock=https://www.mouser.co.uk/ProductDetail/Texas-Instruments/TPS72301DDCT?qs=7z%252BmIopC6%2FL7xVbTZrmV7g%3D%3D
IC4: "Integrated Circuit", Manufacturer_Name=STMicroelectronics, Mouser Part Number=511-LDK130M25R, Arrow Part Number=LDK130M25R, Arrow Price/Stock=https://www.arrow.com/en/products/ldk130m25r/stmicroelectronics, Datasheet Link=http://www.st.com/web/en/resource/technical/document/datasheet/DM00076097.pdf, Height=1.45mm, Manufacturer_Part_Number=LDK130M25R, Mouser Price/Stock=https://www.mouser.com/Search/Refine.aspx?Keyword=511-LDK130M25R
J1 J2 J8: library part JP4, "Connector 4"
J3 J4 J5 J9 J10 J11 J12 J13: "Connector", Manufacturer_Name=Molex, Mouser Part Number=538-171973-0004, Arrow Part Number=171973-0004, Arrow Price/Stock=https://www.arrow.com/en/products/1719730004/molex?region=europe, Datasheet Link=https://www.molex.com/pdm_docs/sd/1719730004_sd.pdf, Height=11.8mm, Manufacturer_Part_Number=171973-0004, Mouser Price/Stock=https://www.mouser.co.uk/ProductDetail/Molex/171973-0004?qs=lc2O%252BfHJPVaHyBdhjsB7Nw%3D%3D
J6: library part "JP 2"
J7: "10 _8 + 2_ Position Card Connector Secure Digital - microSDâ„¢ Surface Mount, Right Angle Gold", Package=None, Availability=Unavailable, MF=Molex, MP=502570-0893, Price=None, SnapEDA_Link=https://www.snapeda.com/parts/502570-0893/Molex/view-part/225170/?ref=snap
J14: "Connector", Manufacturer_Name=Hirose, Manufacturer_Part_Number=DF11-20DP-2DSA(01), Mouser Part Number=798-DF11-20DP-2DSA01, Datasheet Link=https://www.hirose.com/en/product/document?clcode=CL0543-0525-3-01&productname=DF11-20DP-2DSA(01)&series=DF11&documenttype=2DDrawing&lang=en&documentid=0000995343, Height=7.1mm, Mouser Price/Stock=https://www.mouser.co.uk/ProductDetail/Hirose-Connector/DF11-20DP-2DSA01?qs=Ux3WWAnHpjAvHkbqZ9K7Yg%3D%3D
L1: library part 744031001, "Inductor", Manufacturer_Name="Wurth Elektronik", Mouser Part Number=710-744031001, Manufacturer_Part_Number=744031001, Mouser Price/Stock=https://www.mouser.co.uk/ProductDetail/Wurth-Elektronik/744031001?qs=PGXP4M47uW5omdHfp5PCig%3D%3D
L2 L5: library part 744042003, "Inductor", Manufacturer_Name="Wurth Elektronik", Mouser Part Number=710-744042003, Manufacturer_Part_Number=744042003, Mouser Price/Stock=https://www.mouser.co.uk/ProductDetail/Wurth-Elektronik/744042003?qs=PGXP4M47uW67fekbtUi6HQ%3D%3D
L3: library part 744025100, "SMT Shielded Tiny Power Inductor WE-TPC, size 2828, 10 uH, 1 A", DC Resistance max.="190 mOhm", Inductance="10 uH", Operating Temperature="-40 to +125 degC", Rated Current="1 A", Saturation Current="1.1 A", Self Resonant Frequency="41 MHz", ComponentLink1Description=Manufacturer, ComponentLink1URL=http://www.we-online.de, ComponentLink2Description=Datasheet, ComponentLink2URL=https://katalog.we-online.com/pbs/datasheet/744025100.pdf, Mounting Technology=SMT, Packaging="Tape and Reel", Part Number=744025100, Published Date="December 2018", Publisher="Wurth Elektronik", Size=2828
L4: library part 744025150, "SMT Shielded Tiny Power Inductor WE-TPC, size 2828, 15 uH, 0.72 A", DC Resistance max.="400 mOhm", Inductance="15 uH", Operating Temperature="-40 to +125 degC", Rated Current="0.72 A", Saturation Current="0.9 A", Self Resonant Frequency="32 MHz", ComponentLink1Description=Manufacturer, ComponentLink1URL=http://www.we-online.de, ComponentLink2Description=Datasheet, ComponentLink2URL=https://katalog.we-online.com/pbs/datasheet/744025150.pdf, Mounting Technology=SMT, Packaging="Tape and Reel", Part Number=744025150, Published Date="December 2018", Publisher="Wurth Elektronik", Size=2828
LED1 LED2 LED3: "LED Single colour Green and Red"
M1: "MDBT42Q"
R1 R1_3 R1_4 R1_5 R1_6 R2 R2_3 R2_4 R2_5 R2_6 R3_3 R3_4 R5 R6 R7 R8 R9 R10 R11 R12 R13 R14 R15 R16 R17 R18 R19 R20 R21 R22 R23 R24 R25 R26 R27 R28 R29 Rb_3 Rb_4 Rb_5 Rb_6 Rc_3 Rc_4 Rc_5 Rc_6 Rn1 Rn1_3 Rn1_4 Rn1_5 Rn2 Rn2_3 Rn2_4 Rn2_5: library part R, "Resistor 1/4W"
Rn_3 Rn_4: "Resistor", Manufacturer_Name=Bourns, Mouser Part Number=652-3224X-1-105E, Arrow Part Number=3224X-1-105E, Arrow Price/Stock=https://www.arrow.com/en/products/3224x-1-105e/bourns?region=nac, Datasheet Link=https://www.bourns.com/docs/Product-Datasheets/3224.pdf, Height=5mm, Manufacturer_Part_Number=3224X-1-105E, Mouser Price/Stock=https://www.mouser.co.uk/ProductDetail/Bourns/3224X-1-105E?qs=tEaODSGlU8OES45Zo8R5qQ%3D%3D
S1: "Switch", Manufacturer_Name="NKK Switches", Mouser Part Number=633-SS12SDP2, Datasheet Link=https://componentsearchengine.com/Datasheets/1/SS12SDP2.pdf, Height=4mm, Manufacturer_Part_Number=SS12SDP2, Mouser Price/Stock=https://www.mouser.com/Search/Refine.aspx?Keyword=633-SS12SDP2
TP5 TP6 TP7 TP8 TP9 TP10: library part TP1, "Test Point"
U1: "Miniature Single-Cell, Fully Integrated Li-Ion, Li-Polymer Charge Management Controller, 4.2V, 5-Pin SOT-23, Industrial Temperature, Tape and Reel", Supplier Part Number 1=MCP73832T-2ACI/OTTR-ND, Code_IPC=SOT23-5, ComponentLink1Description=Datasheet, ComponentLink1URL=http://ww1.microchip.com/downloads/en/DeviceDoc/21984e.pdf, ComponentLink2Description="Packaging Specification", ComponentLink2URL=http://www.microchip.com/stellent/groups/techpub_sg/documents/packagingspec/en012702.pdf, ComponentLink3Description="Microchip.com Home", ComponentLink3URL=http://www.microchip.com/, DatasheetVersion="revE, Sep-2008", LatestRevisionDate=27-Nov-2009, LatestRevisionNote="Updated to datasheet revision E, Sep-2008", PackageDescription="5-Lead Plastic Small Outline Transistor (OT) [SOT-23]", PackageReference=SOT-23-OT5, PackageVersion="revBB, Aug-2009", Published=29-Jan-2009, Publisher="Altium Limited", Supplier 1=Digi-Key, Supplier 2=Digi-Key, Supplier 3=Digi-Key, Supplier 4=Farnell, Supplier Part Number 2=MCP73832T-2ACI/OTCT-ND, Supplier Part Number 3=MCP73832T-2ACI/OTDKR-ND, Supplier Part Number 4=1332159
U2: library part ADS1299IPAGR, "No Description Available", Built_By=EMA_UL_Team, Copyright="Copyright (C) 2018 Accelerated Designs. All rights reserved", Manufacturer_Part_Number=ADS1299IPAGR, RefDes=RefDes, Type=DEV, Vendor="Texas Instruments"
U3: "No Description Available", Built_By=EMA_UL_Team, Copyright="Copyright (C) 2018 Accelerated Designs. All rights reserved", Manufacturer_Part_Number=OPA2376AIDR, RefDes=RefDes, Type=DEV, Vendor="Texas Instruments"
U4: library part TPS63060DSCR, "No Description Available", Manufacturer="Texas Instruments", Built_By=EMA_UL_Team, Copyright="Copyright (C) 2018 Accelerated Designs. All rights reserved", Manufacturer_Part_Number=TPS63060DSCR, RefDes=RefDes, Type=DEV, Vendor="Texas Instruments"
U6 U7 U8 U9: library part OPA2277U, "10V, 0.1V/?C, High-Precision, Low-Power Operational Amplifier 8-SOIC", Package="SOIC-8 Texas Instruments", Availability=Good, Check_prices=https://www.snapeda.com/parts/OPA2277U/Texas%20Instruments/view-part/9572/?ref=eda, MF="Texas Instruments", MP=OPA2277U, Price=None, Purchase-URL=https://pricing.snapeda.com/search/part/OPA2277U/?ref=eda, SnapEDA_Link=https://www.snapeda.com/parts/OPA2277U/Texas%20Instruments/view-part/9572/?ref=snap
X1: library part Crystal, "Crystal For all Crystal 2pin."

## Free pads (board coordinates)
  round 14 hole 12: 1(160.759,-523.748)
  round 16 hole 12: 1N(216.949,-393.302) 1P(274.567,-387.407)
  round 24 smd far side: 2N(81.572,-434.342) 2P(200.186,-440.371) 3N(138.928,-428.978) 3P(262.834,-442.476)

## Via types
v1: diameter 0.5, hole 0.3, Top Layer to Bottom Layer, 3 vias

## Nets (pads, with @x,y where several pads share a name; then routed paths per layer and width w, separated by ;. In a path a pad name is that pad's centre, name@x,y a point inside that pad or via, vN(x,y) a via of type N, cw(c..) or ccw(c..) an arc to the next point about the centre after c; other vN are vias at no path point)
+2.5V: C1.2 C3.2 C12.1 C26.2 C27.2 C32.2 C33.2 C34.2 C35.2 C49.2 C50.2 C57.2 C61.2 C65.2 C66.2 C73.2 C75.2 J5.4 J9.4 J12.4 J13.4 J14.5 J14.6 J14.19 J14.20 L5.2 TP10.1 U2.19 U2.21 U2.22 U2.54 U2.56 U2.59 U3.8 U6.8 U7.8 U8.8 U9.8 | length 26.7
  Top Layer w0.3: C35.2 cw(c174.71,-527.279) 174.71,-526.852 U2.59 180.385,-526.852 ccw(c180.385,-526.352) 180.885,-526.352 180.885,-524.852 ; U2.56 180.385,-525.352 ccw(c180.385,-524.852) 180.885,-524.852 ; U2.54 180.385,-524.352 cw(c180.385,-524.852) 180.885,-524.852 ; U2.19 U2.19@191.048,-528.352 ; U2.22 U2.21 191.385,-527.352 cw(c191.385,-527.852) 191.885,-527.852 cw(c191.385,-527.852) 191.385,-528.352 191.17,-528.352 U2.19@191.048,-528.352 ; C34.2 C26.2 C27.2 193.898,-529.533 cw(c193.898,-527.209) 192.255,-528.852 ccw(c191.048,-530.059) 191.17,-528.357 cw(c191.193,-528.057) 191.156,-528.355 ccw(c191.111,-528.702) 191.111,-528.352 191.051,-528.352 ccw(c191.048,-530.059) U2.19@191.048,-528.352
  Top Layer w0.5: U3.8 167.308,-542.01 cw(c167.224,-542.094) C12.1
+IN_A5: C55.2 Cn_5.2 D1_5.1 D2_5.3 J4.3 U6.3
+IN_A6: C59.1 Cn.2 D1_6.1 D2_6.3 J10.3 U7.3
+IN_B3: C3_3.1 J13.1 R3_3.2 U9.5
+IN_B4: C3_4.1 J9.1 R3_4.2 U8.5
+IN_B5: C56.1 J5.1 R23.2 U6.5
+IN_B6: C60.1 J12.1 R25.2 U7.5
-2.5V: C2.2 C4.2 C13.2 C20.2 C21.1 C22.2 C23.1 C24.1 C25.1 C26.1 C27.1 C28.2 C29.2 C32.1 C33.1 C45.2 C58.2 C62.2 C69.2 C70.2 C74.2 C79.2 J3.4 J4.4 J10.4 J11.4 J14.11 J14.12 J14.13 J14.14 L2.2 TP9.1 U2.20 U2.23 U2.25 U2.32 U2.53 U2.57 U2.58 U3.4 U6.4 U7.4 U8.4 U9.4 | length 33.4
  Top Layer w0.3: C28.2 ccw(c171.574,-524.244) 171.574,-525.852 172.354,-525.852 174.284,-525.852 U2.57 U2.58 ; U2.20 189.345,-527.852 cw(c189.345,-526.932) 188.425,-526.932 188.425,-525.852 ; U2.23 188.925,-526.352 cw(c188.925,-525.852) 188.425,-525.852 ; U2.32 189.352,-521.852 ccw(c189.352,-522.779) 188.425,-522.779 188.425,-524.352 ; C20.2 U2.25 189.425,-525.352 cw(c189.425,-524.352) 188.425,-524.352 ; 188.425,-525.852 188.425,-524.352
  Top Layer w0.5: C13.2 164.841,-532.575 166.587,-534.32 U3.4 ; C20.2 C33.1 C32.1
-IN_B5: C56.2 R1_5.1 R2_5.2 R24.2 Rc_5.1 U6.2
-IN_B6: C60.2 R1_6.1 R2_6.2 R26.2 Rc_6.1 U7.2
BIAS: C14.2 pad.1 R17.2 TP8.1 U2.62 U2.63 U3.3 | length 29.6
  Top Layer w0.3: pad.1 ccw(c161.004,-523.748) 160.831,-523.921 TP8.1 ; U3.3 168.245,-534.494 ccw(c166.449,-532.698) 168.989,-532.698 TP8.1 ; U2.62 U2.63 178.073,-528.852 ccw(c178.073,-529.26) 177.666,-529.26 177.666,-530.914 cw(c175.126,-530.914) 175.126,-533.454 R17.2 C14.2 171.415,-533.454 cw(c171.415,-530.914) 169.619,-532.71 TP8.1
CS: J2.4 M1.25 R20.1 U2.39
CS_1: J7.2 M1.17
DRDY: J1.2 M1.30 U2.47
DVDD: C15.2 C16.2 C30.2 C31.2 C39.2 C40.2 C46.2 C47.2 IC2.8 IC4.1 IC4.3 J7.4 J8.1 M1.11 R15.2 R16.2 R19.2 R20.2 TP7.1 U2.48 U2.50 U2.52 U4.9 | length 2.5
  Top Layer w0.35: C46.2 210.321,-515.477 cw(c208.525,-517.273) 211.065,-517.273 M1.11
Elec_1: C5.2 R5.2 U2.16 | length 10
  Top Layer w0.3: U2.16 189.345,-531.34 cw(c189.345,-533.88) 191.885,-533.88 R5.2
  Top Layer w0.5: R5.2 C5.2
Elec_2: C6.2 R6.2 U2.15 | length 7.6
  Top Layer w0.3: C6.2 U2.15
  Top Layer w0.5: C6.2 R6.2
Elec_3: C7.2 J14.7 R7.2 U2.14 | length 11.7
  Top Layer w0.3: J14.7 185.885,-537.342 cw(c188.425,-537.342) 186.629,-535.546 186.745,-535.43 ccw(c185.201,-533.886) 187.385,-533.886 U2.14
Elec_4: C8.2 J14.8 R8.2 U2.13 | length 12.4
  Top Layer w0.3: v1(184.635,-538.277) 184.635,-537.348 cw(c187.175,-537.348) 185.379,-535.552 186.141,-534.79 ccw(c184.345,-532.994) 186.885,-532.994 U2.13
  Bottom Layer w0.3: v1(184.635,-538.277) 184.635,-538.845 ccw(c186.023,-538.845) 185.041,-539.826 185.141,-539.926 cw(c183.345,-541.722) 185.885,-541.722 J14.8
Elec_5: C63.2 J14.18 R27.2 U2.12 | length 17
  Top Layer w0.3: v1(177.193,-539.521) ccw(c177.193,-539.466) 177.232,-539.505 177.666,-539.072 cw(c179.462,-540.868) 179.462,-538.328 180.284,-538.328 ccw(c180.284,-535.788) 182.08,-537.584 185.778,-533.886 ccw(c184.313,-532.421) 186.385,-532.421 U2.12
  Bottom Layer w0.3: J14.18 175.885,-541.881 cw(c178.425,-541.881) 176.629,-540.085 v1(177.193,-539.521)
Elec_6: C64.2 J14.17 R28.2 U2.11 | length 17.7
  Top Layer w0.3: J14.17 175.885,-539.214 cw(c178.425,-539.214) 176.629,-537.418 179.961,-534.086 cw(c181.487,-535.612) 181.487,-533.454 183.91,-533.454 ccw(c183.91,-531.054) 185.606,-532.752 ccw(c184.935,-532.079) 185.885,-532.079 U2.11
GND: C1.1 C1_3.2 C1_4.2 C1_5.2 C1_6.2 C2.1 C3.1 C4.1 C5.1 C6.1 C7.1 C8.1 C9.1 C10.1 C11.1 C12.2 C13.1 C15.1 C16.1 C17.1 C18.1 C19.1 C28.1 C29.1 C30.1 C31.1 C34.1 C35.1 C37.2 C38.1 C39.1 C40.1 C41.1 C42.1 C43.1 C44.1 C45.1 C46.1 C47.1 C48.1 C49.1 C50.1 C51.1 C53.1 C54.1 C57.1 C58.1 C61.1 C62.1 C63.1 C64.1 C65.1 C66.1 C69.1 C70.1 C73.1 C74.1 C75.1 C79.1 H1.4 H1.5 IC2.3 IC3.1 IC4.2 J6.2 J7.6 J7.DL J7.DS J8.4 J14.9 J14.10 J14.15 J14.16 LED2.K LED3.K M1.1 M1.12 M1.24 M1.39 R2.1 R3_3.1 R3_4.1 R9.2 R11.2 R12.2 R13.2 R14.2 R18.1 R23.1 R25.1 R29.2 Rb_3.1 Rb_4.1 Rb_5.1 Rb_6.1 Rn2.1 Rn2_3.1 Rn2_4.1 Rn2_5.1 Rn_3.3 Rn_4.3 U1.2 U2.31 U2.33 U2.41 U2.49 U2.51 U4.4 U4.7 U4.11
GUARD_3: J11.2 R1_3.1 R2_3.2 Rc_3.1 U9.2
GUARD_4: J3.2 R1_4.1 R2_4.2 Rc_4.1 U8.2
GUARD_5: R24.1
GUARD_6: R26.1
MISO: J2.2 J7.7 M1.26 U2.43
MOSI: J2.1 J7.3 M1.27 U2.34
NetC1_3_1: C1_3.1 R2_3.1
NetC1_4_1: C1_4.1 R2_4.1
NetC1_5_1: C1_5.1 R2_5.1
NetC1_6_1: C1_6.1 R2_6.1
NetC9_2: C9.2 C10.2 D2.1 LED1.1 U1.4
NetC11_2: C11.2 D1.2 J6.1 U1.3
NetC14_1: C14.1 R17.1 U2.61 | length 8.4
  Top Layer w0.3: C14.1 R17.1 174.473,-531.168 ccw(c174.473,-528.852) 176.789,-528.852 cw(c177.789,-528.852) 177.789,-527.852 U2.61
NetC18_2: C18.2 U4.6
NetC19_2: C19.2 R15.1 R18.2 U4.8
NetC20_1: C20.1 U2.24 | length 4.3
  Top Layer w0.3: U2.24 191.632,-525.852 cw(c191.632,-526.733) 192.255,-526.11 193.608,-527.463 ccw(c194.031,-527.04) C20.1
NetC21_2: C21.2 U2.30 | length 5.5
  Top Layer w0.203: U2.30 191.131,-522.852 ccw(c191.131,-522.312) 191.671,-522.312 191.671,-520.039 cw(c192.204,-520.039) 192.204,-519.505 C21.2
NetC22_1: C22.1 U2.28 | length 4.5
  Top Layer w0.203: U2.28 191.16,-523.852 ccw(c191.16,-522.808) 192.204,-522.808 192.204,-522.779 cw(c193.523,-522.779) C22.1
NetC23_2: C23.2 U2.26 | length 4.4
  Top Layer w0.203: U2.26 191.898,-524.852 ccw(c191.898,-524.244) 192.507,-524.244 cw(c193.283,-524.244) 193.283,-523.468 C23.2
NetC24_2: C24.2 C25.2 U2.55 | length 7.1
  Top Layer w0.3: C24.2 174.626,-523.095 cw(c174.626,-525.635) 176.422,-523.839 176.691,-524.108 ccw(c178.487,-522.312) 177.935,-524.791 cw(c177.87,-525.084) 178.004,-524.816 ccw(c178.159,-524.502) 178.159,-524.852 U2.55
  Top Layer w0.5: C25.2 C24.2
NetC36_1: C36.1 IC2.2
NetC36_2: C36.2 IC2.4
NetC37_1: C37.1 IC3.4 R1.1 R2.2
NetC38_2: C38.2 L3.2 M1.9 | length 6.7
  Top Layer w0.35: M1.9 212.465,-516.866 cw(c214.122,-516.866) C38.2 cw(c216.065,-515.209) 216.065,-513.266 L3.2
NetC41_2: C41.2 C42.2 IC2.5 IC3.2 IC3.3
NetC43_2: C43.2 C44.2 IC3.5 L2.1 R1.2
NetC48_2: C48.2 IC4.5 L5.1
NetC51_2: C51.2 IC4.4
NetC53_2: C53.2 M1.13 X1.2 | length 4.3
  Top Layer w0.305: C53.2 206.961,-516.546 206.961,-517.782 X1.2 ccw(c207.869,-517.145) 207.869,-518.396 M1.13
NetC54_2: C54.2 M1.14 X1.1 | length 4.3
  Top Layer w0.305: C54.2 X1.1 cw(c207.79,-520.235) 207.79,-519.096 M1.14
NetCn_1: Cn.1 Rn1.1 Rn2.2
NetCn_3_1: Cn_3.1 Cn_3a.2 Rn1_3.1 Rn2_3.2 Rn_3.2
NetCn_4_1: Cn_4.1 Cn_4a.2 Rn1_4.1 Rn2_4.2 Rn_4.2
NetCn_5_1: Cn_5.1 Rn1_5.1 Rn2_5.2
NetD1_1: D1.1 S1.2
NetD1_3_3: D1_3.3 D2_3.1 Rb_3.2 Rc_3.2
NetD1_4_3: D1_4.3 D2_4.1 Rb_4.2 Rc_4.2
NetD1_5_3: D1_5.3 D2_5.1 Rb_5.2 Rc_5.2
NetD1_6_3: D1_6.3 D2_6.1 Rb_6.2 Rc_6.2
NetD2_2: D2.2 H1.1
NetL1_1: L1.1 U4.1
NetL1_2: L1.2 U4.10
NetL3_1: L3.1 L4.2 | length 6
  Top Layer w0.35: L4.2 212.169,-510.813 215.24,-510.813 L3.1
NetL4_1: L4.1 M1.10 | length 4.3
  Top Layer w0.35: M1.10 211.765,-514.889 cw(c214.229,-514.889) L4.1
NetLED1_2: LED1.2 R10.1
NetLED2_A: LED2.A R21.2
NetLED3_A: LED3.A R22.2
NetM1_31: M1.31 R22.1
NetM1_32: M1.32 R21.1
NetR9_1: R9.1 U1.5
NetR10_2: R10.2 U1.1
NetR11_1: R11.1 U2.46
NetR12_1: R12.1 U2.45
NetR13_1: R13.1 U2.44
NetR14_1: R14.1 U2.42
NetR16_1: R16.1 U4.5
NetR29_1: R29.1 U2.60 | length 5.7
  Top Layer w0.254: R29.1 174.881,-529.26 ccw(c174.881,-528.091) 176.05,-528.091 cw(c176.789,-528.091) 176.789,-527.352 U2.60
NetTP5_1: TP5.1 U2.17 U3.6 U3.7 | length 31
  Top Layer w0.3: U3.6 U3.7 165.366,-539.169 cw(c166.449,-540.251) 166.449,-538.721 172.434,-538.721 ccw(c172.434,-537.379) TP5.1 ; v1(186.885,-529.352) U2.17 U2.17@190.629,-529.352
  Bottom Layer w0.3: TP5.1 181.614,-530.096 cw(c183.41,-531.892) 183.41,-529.352 v1(186.885,-529.352)
NetU3_1: U3.1 U3.2
OUT_A3: C3_3.2 J11.1 R1_3.2 Rn1_3.2 Rn_3.1 U9.1
OUT_A4: C3_4.2 J3.1 R1_4.2 Rn1_4.2 Rn_4.1 U8.1
OUT_A5: J4.1 J4.2 R1_5.2 Rn1_5.2 U6.1
OUT_A6: J10.1 J10.2 R1_6.2 Rn1.2 U7.1
PWDN: J1.4 M1.34 R19.1 U2.35
REF_IN: TP6.1 U3.5
RESET: J1.3 M1.29 U2.36
SCK: J2.3 M1.28 U2.40
Signal_1: J14.1 pad.1P R5.1 | length 3.5
  Top Layer w0.3: J14.1 R5.1
Signal_2: J14.3 pad.1N R6.1 | length 3.5
  Top Layer w0.5: J14.3 R6.1
Signal_3: C_test3.1 Cn_3.2 Cn_3a.1 D1_3.1 D2_3.3 J11.3 pad.2P U9.3
Signal_3_1: J13.2 J13.3 R7.1 U9.6 U9.7
Signal_4: C_test4.1 Cn_4.2 Cn_4a.1 D1_4.1 D2_4.3 J3.3 pad.2N U8.3
Signal_4_1: J9.2 J9.3 R8.1 U8.6 U8.7
Signal_5: C55.1 C_test5.2 pad.3P
Signal_5_1: J5.2 J5.3 R27.1 U6.6 U6.7
Signal_6: C59.2 C_test6.2 pad.3N
Signal_6_1: J12.2 J12.3 R28.1 U7.6 U7.7
START: J1.1 M1.38 U2.38
SWD_CLK: J7.5 J8.3 M1.36
SWDIO: J8.2 M1.37
VCC: C17.2 S1.3 U4.2 U4.3
pads on no net: C_test3.2 C_test4.2 C_test5.1 C_test6.1 D1_3.2 D1_4.2 D1_5.2 D1_6.2 D2_3.2 D2_4.2 D2_5.2 D2_6.2 H1.2 H1.3 IC2.1 IC2.6 IC2.7 J6.0 J7.1 J7.8 J7.SM1 J7.SM2 J7.SM3 J7.SM4 J14.2 J14.4 M1.2 M1.3 M1.4 M1.5 M1.6 M1.7 M1.8 M1.15 M1.16 M1.18 M1.19 M1.20 M1.21 M1.22 M1.23 M1.33 M1.35 M1.40 M1.41 S1.1 U2.1 U2.2 U2.3 U2.4 U2.5 U2.6 U2.7 U2.8 U2.9 U2.10 U2.18 U2.27 U2.29 U2.37 U2.64

## Keep-outs
Keep-Out Layer:
  circle w0.254: c277.258,-454.131 r2
  circle w0.254: c248.048,-454.131 r2
  circle w0.254: c248.03,-427.397 r2
  circle w0.254: c277.232,-427.18 r2
  circle w0.254: c151.435,-394.482 r2
  circle w0.254: c151.435,-376.382 r2
  circle w0.254: c76.523,-401.229 r2
  circle w0.254: c76.523,-381.277 r2
  circle w0.254: c152.718,-416.371 r2
  circle w0.254: c152.79,-444.617 r2
  circle w0.254: c132.992,-394.482 r2
  circle w0.254: c132.992,-376.382 r2
  circle w0.254: c92.274,-401.229 r2
  circle w0.254: c92.274,-381.277 r2
  circle w0.254: c125.396,-444.363 r2
  circle w0.254: c124.944,-416.371 r2
  circle w0.254: c186.153,-452.346 r2
  circle w0.254: c186.129,-424.311 r2
  circle w0.254: c215.353,-452.346 r2
  circle w0.254: c215.379,-424.379 r2
  circle w0.254: c68.02,-422.32 r2
  circle w0.254: c68.371,-450.312 r2
  circle w0.254: c95.743,-450.413 r2
  circle w0.254: c95.794,-422.32 r2
  lines w0.254: 63.718,-450.913 63.396,-423.183 cw(c67.796,-422.682) 67.296,-418.282 94.396,-418.292 cw(c94.371,-424.207) 100.286,-424.232 100.286,-450.314 ; 63.747,-450.912 ccw(c68.074,-450.44) 68.547,-454.767 ; 68.592,-454.812 73.647,-454.812 ; 75.724,-405.477 cw(c75.724,-400.53) 70.777,-400.53 70.777,-379.812 cw(c75.112,-379.812) 75.112,-375.477 94.074,-375.525 cw(c93.8,-379.538) 97.812,-379.812 97.812,-400.53 cw(c92.895,-400.51) 92.874,-405.427 89.674,-405.427 ; 75.724,-405.427 78.374,-405.427 ; 88.845,-454.914 95.545,-454.914 ; 95.374,-454.869 ccw(c95.527,-450.16) 100.235,-450.314 ; 120.331,-443.092 ccw(c125.279,-443.092) 125.279,-448.04 ; 120.337,-443.092 120.028,-416.479 cw(c124.428,-415.979) 123.928,-411.578 152.294,-411.588 ; 125.249,-448.108 130.29,-448.108 130.29,-458.289 ; 133.192,-370.482 ccw(c133.192,-375.482) 128.192,-375.482 128.192,-395.482 ccw(c133.192,-395.482) 133.192,-400.482 150.342,-400.482 ccw(c150.342,-395.394) 155.43,-395.394 155.43,-375.246 ccw(c150.642,-375.246) 150.605,-370.458 148.323,-370.458 ; 133.292,-370.382 136.678,-370.382 ; 145.348,-458.289 145.348,-448.191 145.355,-448.185 152.38,-448.185 ; 152.03,-448.191 ccw(c152.182,-443.508) 156.865,-443.661 ; 152.312,-411.628 cw(c152.292,-416.202) 156.867,-416.222 ; 156.867,-443.661 156.867,-416.202 ; 181.856,-425.751 cw(c186.856,-425.75) 186.856,-420.75 192.542,-420.75 ; 181.879,-451.321 ccw(c186.879,-451.321) 186.88,-456.321 ; 181.88,-451.221 181.88,-425.761 ; 186.879,-456.289 214.605,-456.289 ccw(c214.605,-451.213) 219.681,-451.212 ; 209.789,-420.791 214.706,-420.791 cw(c214.707,-425.791) 219.707,-425.791 ; 219.681,-451.213 219.681,-425.791 ; 243.84,-428.253 cw(c248.84,-428.252) 248.84,-423.252 ; 243.857,-453.386 ccw(c248.857,-453.386) 248.858,-458.386 ; 243.858,-453.286 243.858,-428.135 ; 248.677,-423.283 255.078,-423.283 255.078,-421.155 255.078,-411.089 ; 248.857,-458.353 276.583,-458.353 ccw(c276.583,-453.277) 281.659,-453.276 ; 268.881,-411.042 268.881,-423.029 276.541,-423.029 ; 276.632,-423.008 cw(c276.634,-428.008) 281.634,-428.008 ; 281.659,-453.277 281.659,-428.008
  lines w0.5: 67.875,-618.625 71.1,-621.85 77.275,-621.85 79.975,-624.55 276.75,-624.55 293.7,-607.6 293.7,-477.225 287.525,-471.05 68.675,-471.05 67.875,-471.85 67.875,-618.625

## Silkscreen, mask and mechanical layers (free items; w line width, h text height)
Top Overlay:
  text "signal1" at 138.432,-376.872 h2.5
  text "signal2" at 79.461,-401.553 h2.5
  text "elec3" at 199.055,-424.252 h1 r90
  text "signal3" at 198.08,-427.016 h2.5
  text "elec5" at 260.837,-427.119 h1 r90
  text "signal5" at 259.125,-429 h2.5
  text "signal6" at 133.95,-443.906 h2.5
  text "elec6" at 138.576,-446.706 h1 r90
  text "signal4" at 77.879,-449.741 h2.5
  text "elec4" at 82.104,-452.388 h1 r90
  text "elec2" at 115.174,-556.012 h1 r90
  text "VCC" at 138.211,-557.028 h1
  text "VBAT" at 115.809,-559.467 h1
  text "DVDD" at 160.995,-561.476 h1
  text "DAT" at 161.605,-563.912 h1
  text "CLK" at 161.783,-566.248 h1
  text "GND" at 161.625,-569.325 h1
  text "-2.5V" at 111.618,-589.515 h2
  text "+2.5V" at 111.871,-592.805 h2
  text "elec1" at 103.282,-596.043 h1 r90
Bottom Overlay:
  text "BIAS" at 154.626,-545.021 h1
Mechanical 1:
  text "FPC" at 139.651,-363.207 h3.5
  text "FPC" at 83.955,-395.274 h3.5
  text "FPC" at 134.705,-454.327 h3.5

## Text inside footprints (layer, text, board x,y; h text height)
H1: Top Overlay "B-F" at 85.075,-569.417 h0.9 r90
J7: Mechanical 13 "Card Lock Position" at 210.446,-549.656 h0.41 r180
LED2: Top Overlay "+" at 233.565,-527.84 h0.8 r270
LED3: Top Overlay "+" at 231.66,-527.84 h0.8 r270
M1: Mechanical 2 "No ground pad" at 222.675,-519.281 h0.45 r270; Mechanical 3 "Toplayer no ground pad" at 216.79,-519.096 h0.3 r270
U3: Top Overlay "*" at 170.008,-536.933 h1.27 r225; Mechanical 13 "*" at 168.392,-536.88 h1.27 r225; Mechanical 7 "0.157in/3.988mm" at 171.369,-539.219 h0.64 r225; Mechanical 7 "0.197in/5.004mm" at 162.42,-540.768 h0.64 r225; Mechanical 7 "0.05in/1.27mm" at 173.699,-531.285 h0.64 r225; Mechanical 7 "0.05in/1.27mm" at 165.487,-530.302 h0.64 r225
U4: Top Overlay "*" at 141.729,-557.763 h1.27; Mechanical 13 "*" at 142.32,-558.83 h1.27